# Altium PCB Sensor_Glove-X02.PcbDoc (part 3 of 3)
Units mil, origin at the board's own origin, x right, y up, seen from the top; angles counter-clockwise.
Board outline 1190 x 1020 mil, 2 copper layers (Top Layer, Bottom Layer), stack 5.556 mil thick; 101 components, 52 nets, 320 pads, 71 vias.
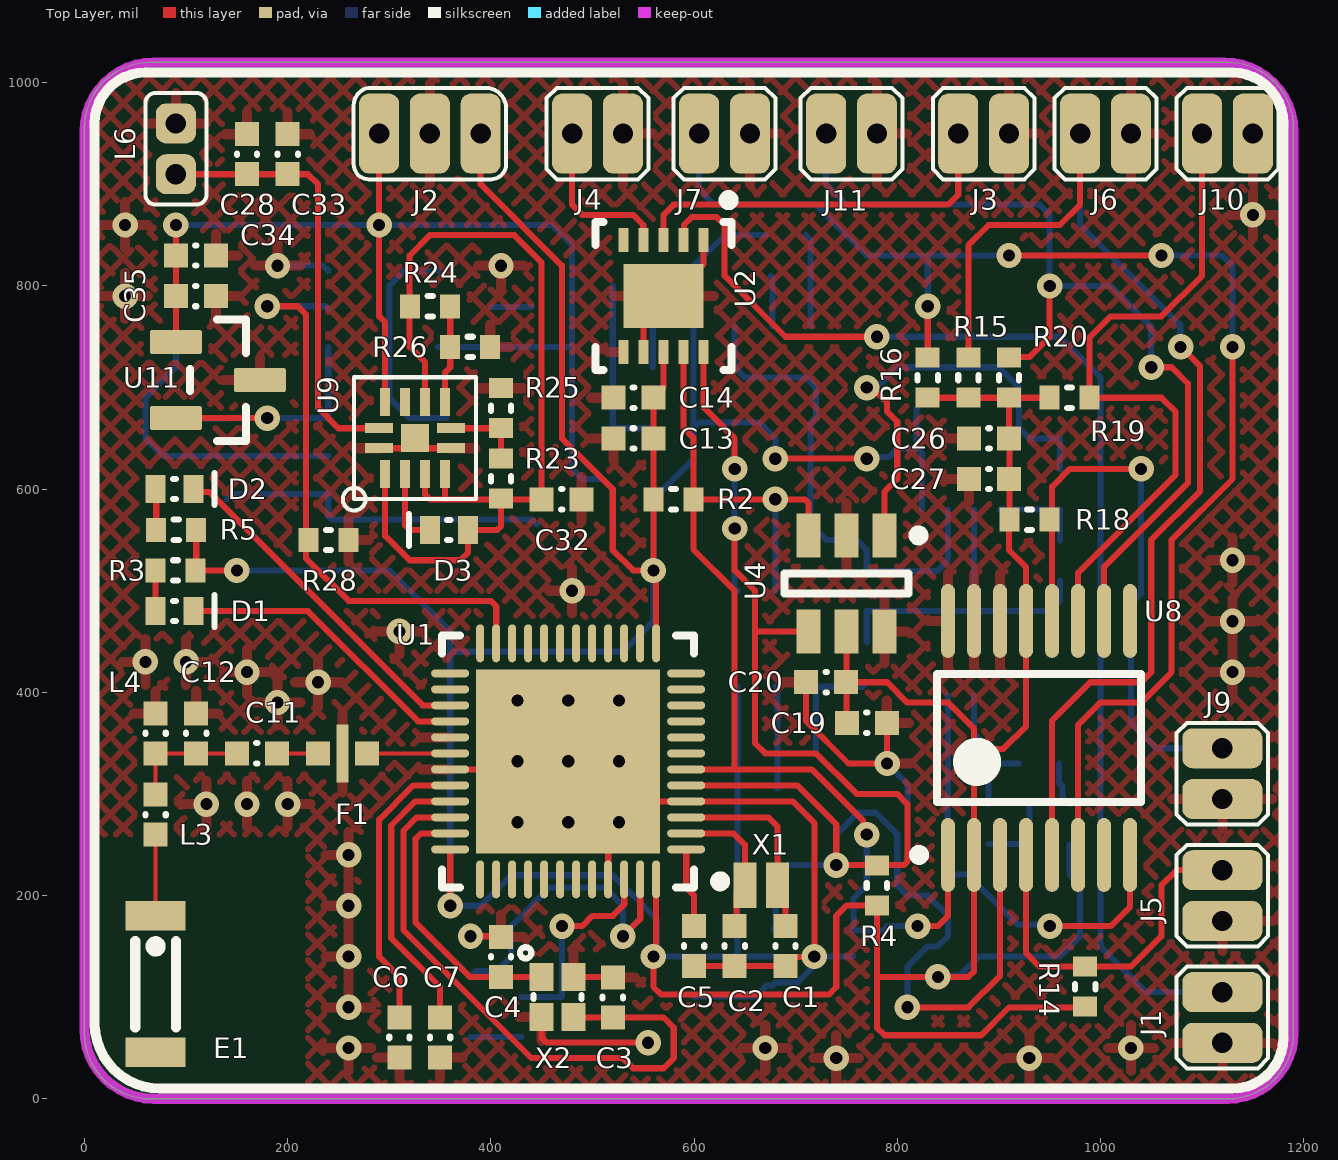
[diagram p0: Top Layer view]

## Part data (continued)
U13: library part CMP-0859-00176-3, "Single Positive-Edge-Triggered D-Type Flip-Flop, DBV0005A, LARGE T&R", Case/Package=SOT-23, Frequency=160MHz, High Level Output Current=-32mA, Low Level Output Current=32mA, Manufacturer="Texas Instruments", Max Operating Temperature=125°C, Max Supply Voltage=5.5V, Min Operating Temperature=-40°C, Min Supply Voltage=1.65V, Package Quantity=3000, Supplier Part Number 1=296-9851-1-ND, Category="Latches and Flip Flops", Clock Edge Trigger Type="Positive Edge", ComponentLink1Description=https://www.ti.com:443/lit/ds/symlink/sn74lvc1g80.pdf?src-supplier=IHS+Markit, ComponentLink1URL=https://www.ti.com:443/lit/ds/symlink/sn74lvc1g80.pdf?src-supplier=IHS+Markit, ComponentLink2Description=https://datasheet.ciiva.com/15091/getdatasheetpartid-71921-15091286.pdf?src-supplier=Verical, ComponentLink2URL=https://datasheet.ciiva.com/15091/getdatasheetpartid-71921-15091286.pdf?src-supplier=Verical, ComponentLink3Description=https://datasheet.ciiva.com/1854/sn74lvc1g80-1854761.pdf?src-supplier=Digi-Key, ComponentLink3URL=https://datasheet.ciiva.com/1854/sn74lvc1g80-1854761.pdf?src-supplier=Digi-Key, ComponentLink4Description=https://datasheet.ciiva.com/46395/1882705-46395835.pdf?src-supplier=Element14, ComponentLink4URL=https://datasheet.ciiva.com/46395/1882705-46395835.pdf?src-supplier=Element14, ComponentLink5Description=https://datasheet.ciiva.com/1854/sn74lvc1g80-1854762.pdf?src-supplier=Digi-Key, ComponentLink5URL=https://datasheet.ciiva.com/1854/sn74lvc1g80-1854762.pdf?src-supplier=Digi-Key, ComponentLink6Description=https://datasheet.ciiva.com/8055/1831218-8055610.pdf?src-supplier=Element14, ComponentLink6URL=https://datasheet.ciiva.com/8055/1831218-8055610.pdf?src-supplier=Element14, ComponentLink7Description=https://datasheet.ciiva.com/1854/sn74lvc1g80-1854763.pdf?src-supplier=Digi-Key, ComponentLink7URL=https://datasheet.ciiva.com/1854/sn74lvc1g80-1854763.pdf?src-supplier=Digi-Key, Lead Free="Lead Free", Logic Function=D-Type,Flip-Flop, Manufacturer Part Number=SN74LVC1G80DBVR, Max Frequency=160MHz, Mount="Surface Mount", Number of Bits=1, Number of Bits per Element=1, Number of Circuits=1, Number of Elements=1, Number of Gates=1, Number of Input Lines=1, Number of Output Lines=1, Number of Pins=5, Output Current=32mA, Packaging="Tape and Reel", Polarity=Inverting, Pricing 1="1=0.32000, 10=0.24000, 25=0.21000, 100=0.13590, 250=0.11252, 500=0.09000, 1000=0.06900 (USD)", Propagation Delay=9.9ns, Radiation Hardening=No, REACH SVHC="No SVHC", RoHS=Yes, Stock 1=12348, Supplier 1=Digi-Key, Turn-On Delay Time=1.1ns, Weight=0.000557oz
X1: library part CRYSTAL_32K768, "Parallel - Fundamental Quartz Crystal, 0.032768MHz Nom", Case/Package=SMD/SMT, ESR (Equivalent Series Resistance)=90kR, Frequency=32.768kHz, Frequency Tolerance=20ppm, Load Capacitance=9pF, Manufacturer="ECS International", Manufacturer Part Number=ECS-.327-9-1210-TR, Max Operating Temperature=85°C, Min Operating Temperature=-40°C, Supplier Part Number 1=XC2283CT-ND, Category="Crystals and Oscillators", ComponentLink1Description=https://datasheet.ciiva.com:443/pdfs/VipMasterIC/IC/ECSI/ECSI-S-A0009254912/ECSI-S-A0009254912-1.pdf?src-supplier=IHS+Markit, ComponentLink1URL=https://datasheet.ciiva.com:443/pdfs/VipMasterIC/IC/ECSI/ECSI-S-A0009254912/ECSI-S-A0009254912-1.pdf?src-supplier=IHS+Markit, ComponentLink2Description=https://www.ecsxtal.com/store/pdf/ECX-1210.pdf?src-supplier=Digi-Key, ComponentLink2URL=https://www.ecsxtal.com/store/pdf/ECX-1210.pdf?src-supplier=Digi-Key, Mount="Surface Mount", Packaging="Tape and Reel", Pricing 1="1=1.52000, 10=1.45400, 50=1.42060, 100=1.21770, 500=1.18388, 1000=0.99784, 2500=0.94710 (USD)", RoHS=No, Stock 1=5205, Supplier 1=Digi-Key
X2: library part CRYSTAL_32MHz, "Parallel - Fundamental Quartz Crystal, 32MHz Nom", Case/Package=SMD/SMT, ESR (Equivalent Series Resistance)=80R, Frequency Stability=10ppm, Load Capacitance=8pF, Manufacturer=Diodes, Manufacturer Part Number=US3200005Z, Max Operating Temperature=70°C, Min Operating Temperature=-20°C, Supplier Part Number 1=US3200005ZCT-ND, Category=Crystals, ComponentLink1Description=https://datasheet.ciiva.com:443/pdfs/VipMasterIC/IC/DIOD/DIOD-S-A0002236499/DIOD-S-A0002236499-1.pdf?src-supplier=IHS+Markit, ComponentLink1URL=https://datasheet.ciiva.com:443/pdfs/VipMasterIC/IC/DIOD/DIOD-S-A0002236499/DIOD-S-A0002236499-1.pdf?src-supplier=IHS+Markit, ComponentLink2Description=https://media.digikey.com/pdf/Data%20Sheets/Pericom%20PDFs/US3200005Z_Ver.A.pdf?src-supplier=Digi-Key, ComponentLink2URL=https://media.digikey.com/pdf/Data%20Sheets/Pericom%20PDFs/US3200005Z_Ver.A.pdf?src-supplier=Digi-Key, Frequency=32MHz, Frequency Tolerance=10ppm, Height=0.014inch, Length=0.063inch, Mount="Surface Mount", Packaging="Tape and Reel", Pricing 1="1=1.45000, 10=1.38400, 50=1.35200, 100=1.15880, 500=1.12666, 1000=0.94961 (USD)", RoHS=Yes, Supplier 1=Digi-Key, Width=0.047inch

## Via types
v1: diameter 25, hole 12, Top Layer to Bottom Layer, 71 vias

## Nets (pads, with @x,y where several pads share a name; then routed paths per layer and width w, separated by ;. In a path a pad name is that pad's centre, name@x,y a point inside that pad or via, vN(x,y) a via of type N, cw(c..) or ccw(c..) an arc to the next point about the centre after c; other vN are vias at no path point)
\H\E\_\E\N\: U11.2 U12.6 U13.1 | length 220
  Top Layer w6: U11.2 v1(180,670)
  Bottom Layer w6: v1(180,670) U12.6 U13.1
\Q\_\O\U\T\: U12.1 U13.4 | length 228.8
  Bottom Layer w6: U13.4 314.8,814.8 300,800 300,690 320,670 U12.1
BLE_ANT: F1.1 U1.30 | length 81.8
  Top Layer w4: F1.1 U1.30
CAP_S1: J1.1 U2.2 | length 1221.7
  Top Layer w6: U2.2 590,845.43 590,860 598,868 622,868 630,860 630,810 690,750 v1(780,750)
  Bottom Layer w6: v1(780,750) 960,750 1000,710 1000,150 1045,105 J1.1
CAP_S2: J3.1 U2.3 | length 383.2
  Top Layer w6: U2.3 570,870 580,880 850,880 860,890 J3.1
CAP_S3: J4.1 U2.4 | length 163.3
  Top Layer w6: J4.1 480,880 490,870 540,870 550,860 550,845.43 U2.4
DEC4: C8.2 L1.1 U1.46 | length 204.8
  Top Layer w6: v1(470,170) 490,170 500,180 520,180 531.26,191.26 U1.46
  Bottom Layer w6: L1.1 C8.2 v1(470,170)
ENABLE_LDO: R27.1 U10.3 U12.4 | length 332.3
  Bottom Layer w6: R27.1 145.2,595.2 U12.4 240,573.51 243.51,570 440.71,570 U10.3
GND: C1.1 C2.1 C3.2 C4.2 C5.2 C6.2 C7.2 C8.1 C9.2 C10.1 C12.2 C13.2 C14.2 C15.2 C16.1 C17.2 C19.2 C20.2 C21.2 C22.2 C23.2 C24.2 C25.2 C26.2 C27.2 C28.2 C29.2 C30.2 C31.1 C32.2 C33.2 C34.2 C35.1 C36.2 C37.1 C38.2 C39.1 F1.3 J1.2 J2.2 J3.2 J4.2 J5.1 J6.1 J7.1 J9.1 J10.1 J11.1 L4.1 L6.2 R13.2 R22.2 R25.2 R26.2 R27.2 R28.1 U1.4 U1.29 U1.31 U1.45 U1.49 U2.1 U2.6 U2.7 U3.2 U3.4 U3.7 U4.2 U4.6 U5.1 U5.4 U6.2 U7.2 U7.6 U8.14 U8.15 U8.16 U9.5 U9.12 U9.13 U10.2 U11.3 U12.2 U12.3 U13.3 X2.2 X2.4 | length 1891.6
  Top Layer w6: U9.12 315.59,640.32 U9.13 335.28,640.32 U9.5 ; U1.31 U1.49@468.27,324.25 ; v1(380,160) 409.37,160 C4.2 ; X2.2 450,60 454.8,55.2 v1(554.8,55.2) ; v1(476.14,332.13) 515.51,292.76 U1.45 ; X2.4 519.37,120 C3.2 ; v1(526.14,272.13) 546.77,292.76 U1.4 697.24,292.76 718.39,271.61 v1(718.39,140) 717.83,139.44 698.81,139.44 C1.1 C2.1 C5.2 ; U2.7 550.31,770.31 570,790 577.87,790 609.37,821.5 U2.1@609.37,845.12 ; C20.2@712.28,408.03 C20.2 710.32,371.69 752,330 v1(790,330) 790,369.69 C19.2
  Bottom Layer w6: C36.2 C37.1 ; v1(190,820) 234.8,820 U13.3 ; C38.2 C39.1 ; C31.1 C30.2 ; C10.1 660.63,100.63 671.5,111.5 677.09,111.5 U3.4 701.7,114.41 718.39,131.09 v1(718.39,140) U3.2 ; R13.2 677.4,808.03 U6.2 ; U7.2 681.97,403.54 C24.2 C25.2 ; v1(790,330) 810,310 C21.2 ; C16.1 959.37,310.63 962.53,307.47 962.53,296.84 R22.2
  other v1: 740,40 930,40 260,50 670,50 1030,50 260,90 260,140 260,190 260,240 426.14,272.13 476.14,272.13 120,290 160,290 200,290 426.14,332.13 526.14,332.13 190,390 426.14,392.13 476.14,392.13 526.14,392.13 230,410 160,420 1130,420 60,430 100,430 310,460 1130,470 480,500 1130,530 40,790 410,820 40,860 1150,870
LBSEL: C32.1 D3.A R23.1 R24.2 U9.1 U9.3 U9.4 U9.8 | length 933.9
  Top Layer w6: U9.1 295.91,554.09 320,530 370,530 377.51,537.51 377.51,559.89 D3.A 406.49,560 410,563.51 R23.1@410,590 ; U9.3 335.28,594.72 340,590 355,590 ; U9.8 335.28,724.72 320,740 320,780 320,830 340,850 423.03,850 450,823.03 C32.1 410.63,590 R23.1 R23.1@410,590 ; U9.4 U9.4 355,590 ; 355,590 R23.1@410,590
LED_BLE: D2.K U1.27 | length 325.5
  Top Layer w6: D2.K 110.13,597.27 122.73,597.27 332.76,387.24 U1.27@344.73,387.24
LED_IND: D1.K U1.28 | length 297.5
  Top Layer w6: D1.K 220,480 328.5,371.5 U1.28
MCU_ENABLE_VCC: R28.2 U1.23 U13.2 | length 585.7
  Top Layer w6: v1(180,780) 210,780 218,772 218,570 218,532 260,490 400,490 405.28,484.72 U1.23
  Bottom Layer w6: v1(180,780) 237.4,780 U13.2
NetC1_2: C1.2 U1.3 X1.1 | length 194.8
  Top Layer w6: U1.3 672.99,277.01 682.28,267.72 X1.1 690,202.28 C1.2
NetC2_2: C2.2 U1.2 X1.2 | length 146.5
  Top Layer w6: U1.2 638.74,261.26 650,250 X1.2 641.68,201.68 641.68,171.68 C2.2
NetC3_1: C3.1 U1.34 X2.3 | length 608.8
  Top Layer w6: U1.34 359.64,276.65 326.65,276.65 314,264 314,166 440,40 530,40 540,30 570,30 580,40 580,70 570,80 C3.1 482.13,80 X2.3
NetC4_1: C4.1 U1.35 X2.1 | length 264.9
  Top Layer w6: U1.35 331.26,261.26 326,256 326,173.32 379.32,120 C4.1 X2.1
NetC5_1: C5.1 U1.1 | length 78.7
  Top Layer w6: U1.1 592.28,207.72 600,200 C5.1
NetC6_1: C6.1 U1.32 | length 287
  Top Layer w6: C6.1 310,120 290,140 290,274.76 323.75,308.5 U1.32
NetC7_1: C7.1 U1.33 | length 276.7
  Top Layer w6: C7.1 350,110 302,158 302,268.97 325.79,292.76 U1.33
NetC11_1: C11.1 F1.2 | length 40.6
  Top Layer w4: C11.1 F1.2
NetC11_2: C11.2 C12.1 L3.1 L4.2 | length 120.6
  Top Layer w4: L3.1 L4.2 C12.1 C11.2
NetC16_2: C16.2 C18.1 R9.2 U5.2 | length 143.5
  Bottom Layer w6: U5.2 875.59,359.29 887.59,347.3 887.59,331.78 C18.1 ; R9.2 890,329.37 C18.1 ; C16.2 C18.1
NetC18_2: C18.2 C21.1 R11.2 U5.3 | length 137.2
  Bottom Layer w6: R11.2@849.37,260 C21.1 850,290.63 C18.2 U5.3
NetC28_1: C28.1 C33.1 L6.1 U9.11 | length 432.4
  Top Layer w6: L6.1 C28.1 220,910 230,900 230,680 250,660 U9.11
NetC29_1: C29.1 C30.1 C31.2 L5.1 U10.5 | length 180
  Bottom Layer w6: C29.1 C30.1 C31.2 U10.5 L5.1
NetD1_A: D1.A R3.2 | length 40
  Top Layer w6: D1.A R3.2
NetD2_A: D2.A R5.2 | length 40.3
  Top Layer w6: D2.A 70.63,599.37 R5.2
NetD3_K: D3.K U9.2 | length 76.6
  Top Layer w6: U9.2 315.59,564.41 320,560 D3.K
NetE1_1: E1.1 L3.2 | length 80
  Top Layer w4: E1.1 L3.2
NetL1_2: L1.2 L2.1 | length 50
  Bottom Layer w6: L2.1 L1.2
NetL2_2: L2.2 U1.47 | length 304.2
  Top Layer w6: v1(530,160) 547.01,177.01 U1.47
  Bottom Layer w6: L2.2 384.86,125.49 405.49,125.49 420,140 420,170 458,208 512,208 530,190 v1(530,160)
NetR6_1: R6.1 R7.2 U5.8 | length 89.4
  Bottom Layer w6: U5.8 R6.1 R7.2
NetR7_1: R7.1 R8.1 R10.2 U5.7 | length 344.8
  Bottom Layer w6: R8.1 R10.2 875.59,480 ; U5.7 875.59,480 ; R7.1 960,490 950,480 875.59,480
NetR10_1: R10.1 U5.6 U6.1 U6.4 | length 485.9
  Bottom Layer w6: U6.1 640,720 650,710 710,710 720,700 720,670.71 U6.4 714.8,565.2 730,550 760,550 770,540 R10.1 839.37,519.37 850,530 U5.6
NetR12_2: R12.2 R13.1 U6.3 | length 92
  Bottom Layer w6: R12.2 714.8,845.2 R13.1 U6.3
NetR23_2: R23.2 R25.1 U9.6 | length 79.1
  Top Layer w6: U9.6 R25.1 R23.2
NetR24_1: R24.1 R26.1 U9.7 | length 96.5
  Top Layer w6: U9.7 354.96,714.96 360,720 R26.1 R24.1
SCL_I2C: R2.2 U1.6 U2.9 U3.1 U4.3 U7.5 U8.1 | length 1137.4
  Top Layer w6: U2.9 589.68,660.32 599.37,650.63 R2.2 ; U1.6 640,324.25 ; U4.3 712.6,586.49 709.08,590 v1(680,590) R2.2 ; v1(770,260) 766.36,263.64 766.36,273.64 715.75,324.25 640,324.25 ; v1(820,170) 840,170 850,180 U8.1 ; R2.2 599.37,540.63 640,500 640,324.25
  Bottom Layer w6: U7.5 v1(680,590) ; v1(770,260) 770,210 756.77,196.77 U3.1 785.59,165.59 790,170 v1(820,170)
SDA_I2C: R4.2 U1.5 U2.10 U3.6 U4.4 U7.4 U8.3 | length 1704.2
  Top Layer w6: U1.5 701.5,308.5 740,270 v1(740,230) 806.49,230 810,233.51 810,290 800,300 760,300 720,340 670,340 660,350 660,460 ; U2.10 609.37,680.63 640,650 v1(640,620) ; v1(640,561.3) 640,520 660,500 660,460 ; U4.4 660,460 ; v1(810,90) 870,90 901.18,121.18 U8.3
  Bottom Layer w6: v1(640,620) v1(640,561.3) 640,502.6 U7.4 ; U3.6@678.39,167.2 U3.6 680,220 690,230 v1(740,230) 740,260 749.8,269.8 749.8,270.2 761.09,281.5 778.91,281.5 800,260.41 800,210 810,200 830,200 850,180 850,160 840,150 830,150 810,130 v1(810,90)
SG_S1: J5.2 R14.2 U8.4 | length 364.1
  Top Layer w6: U8.4 926.77,143.23 940,130 1030,130 1060,160 1060,210 1075,225 J5.2
SG_S2: J6.2 R15.2 U8.5 | length 1155.7
  Top Layer w6: R15.2 870,840 890,860 960,860 980,880 J6.2 ; U8.5 952.36,372.36 990,410 1040,410 1050,420 1050,550 1098,598 1098,720.86 v1(1078.86,740)
  Bottom Layer w6: J6.2 980,860 1078.5,761.5 1078.5,740.36 v1(1078.86,740)
SG_S3: J7.2 R16.2 U8.6 | length 1378.1
  Top Layer w6: R16.2 v1(830,780) ; v1(910,830) v1(1060,830) ; U8.6 977.95,367.95 1000,390 1040,390 1070,420 1070,550 1130,610 v1(1130,740)
  Bottom Layer w6: J7.2 605,895 620,880 720,880 770,830 830,830 ; v1(830,780) 830,830 ; v1(910,830) 830,830 ; v1(1060,830) 1120,830 1130,820 v1(1130,740)
T_S1: J9.2 R18.2 U8.12 | length 581.5
  Top Layer w6: U8.12 952.36,570 952.36,602.36 970,620 v1(1040,620)
  Bottom Layer w6: v1(1040,620) 1040,497.43 1030,487.43 1030,370 1055,345 J9.2
T_S2: J10.2 R19.2 U8.11 | length 671
  Top Layer w6: U8.11 977.95,517.95 1074,614 1074,676 1060,690 R19.2 989.37,749.37 1010,770 1060,770 1100,810 J10.2
T_S3: J11.2 R20.2 U8.10 | length 918
  Top Layer w6: R20.2 910.63,730 930,730 950,750 v1(950,800) ; U8.10 1003.54,523.54 1086,606 1086,704 1070,720 v1(1050,720)
  Bottom Layer w6: J11.2 730,900 750,880 940,880 950,870 v1(950,800) 1010,800 1050,760 v1(1050,720)
V_BATT: C34.1 C35.2 C36.1 C37.2 C38.1 C39.2 J2.1 U9.10 U10.1 U11.1 U12.5 U13.5 | length 1634.5
  Top Layer w6: U11.1 C35.2 v1(90,860) ; J2.1@290,960 v1(290,860) 290,770 295.91,764.09 U9.10
  Bottom Layer w6: U12.5 77.4,632.6 60,650 60,690 90,720 v1(90,860) v1(290,860) 460,860 480,840 480,740 ; U13.5 C38.1 C39.2 480,740 ; U10.1 520,600 510,610 490,610 480,620 480,740
VCC: C9.1 C10.2 C13.1 C14.1 C19.1 C20.1 C22.1 C23.1 C24.1 C25.1 C26.1 C27.1 J2.3 L5.2 R2.1 R3.1 R4.1 R5.1 R12.1 R14.1 R15.1 R16.1 R18.1 R19.1 R20.1 R21.1 U1.13 U1.36 U1.48 U2.8 U3.5 U4.5 U5.5 U6.5 U7.3 U8.2 U8.13 | length 5205.2
  Top Layer w6: R5.1 110,520.63 R3.1 v1(150,520) ; v1(360,190) U1.36 ; J2.3@390,960 390,900 470,820 470,650 520,600 520,540 540,520 v1(560,520) ; U1.48 562.4,215.63 562.4,142.4 v1(560,140) 560,110 567.51,102.49 732.49,102.49 740,110 740,180 750.32,190.31 R4.1 780,120 ; U1.13 562.4,448.63 562.4,517.6 v1(560,520) ; U2.8@568.08,732.96 U2.8 570,700 C14.1 C13.1 R2.1 v1(560,520) ; v1(680,630) v1(770,630) ; C19.1@750,380 750,409.69 C20.1 C20.1@750,410 ; U4.5 C20.1@750,410 ; R16.1 R15.1 R20.1 ; R19.1 R20.1 ; R14.1 984.37,90 910,90 882.49,62.49 787.51,62.49 780,70 780,120 ; C20.1@750,410 790,410 810,390 850,390 875.59,364.41 875.59,344.41 ; 780,120 v1(840,120) 870,120 875.59,125.59 U8.2 875.59,344.41 ; 875.59,344.41 904.41,344.41 926.77,366.77 U8.13 926.77,523.23 910,540 910,569.37 R18.1 910.63,649.37 C26.1 R20.1
  Bottom Layer w6: v1(150,520) 300,520 360,460 360,440 ; U7.3 C24.1 C25.1 C9.1@642.6,140 ; R12.1 630,850 599.37,819.37 L5.2 ; U3.5 C9.1@642.6,140 ; v1(680,630) 680,650 664.49,665.51 U6.5 604.88,665.51 L5.2 ; v1(770,630) 771.5,631.5 791.5,631.5 800,640 C23.1 ; C22.1 818.82,678.82 818.82,641.18 C23.1 ; U5.5 824.41,635.59 C23.1 ; v1(840,120) 841.5,121.5 861.5,121.5 880,140 960,140 980,160 980,210 969.37,220.63 R21.1 ; 360,440 530,440 560,470 v1(560,520) 560,590 599.37,629.37 L5.2 ; 360,440 v1(360,190) 390,190 420,220 520,220 563.51,176.49 563.51,143.51 v1(560,140) C10.2 C9.1 C9.1@642.6,140
WB_REF_DAC: C17.1 R8.2 U7.1 | length 121
  Bottom Layer w6: C17.1 720,402.91 U7.1 765.51,405.51 R8.2
WB_V1: R11.1 U8.8 | length 258.9
  Top Layer w6: v1(950,170) 1010,170 1029.13,189.13 U8.8
  Bottom Layer w6: R11.1 869.37,220.63 918.5,171.5 948.5,171.5 v1(950,170)
WB_V2: R9.1 R21.2 R22.1 | length 80.3
  Bottom Layer w6: R9.1 929.37,250.63 R21.2 R22.1
WB_V_OUT: C15.1 R6.2 U4.1 | length 448.8
  Top Layer w6: v1(770,700) 775.14,700 786.21,688.93 786.55,688.93 790.06,685.41 790.06,676.42 800,666.49 800,610 787.4,597.4 U4.1@787.4,557.09 ; U4.1 U4.1@790,557.09
  Bottom Layer w6: v1(770,700) 773.64,703.64 783.64,703.64 800,720 900,720 920,700 920,660 930,650 C15.1 R6.2
pads on no net: E1.2 U1.7 U1.8 U1.9 U1.10 U1.11 U1.12 U1.14 U1.15 U1.16 U1.17 U1.18 U1.19 U1.20 U1.21 U1.22 U1.24 U1.25 U1.26 U1.37 U1.38 U1.39 U1.40 U1.41 U1.42 U1.43 U1.44 U2.5 U3.3 U8.7 U8.9 U9.9 U10.4

## Polygon pours and split planes (outlines as drawn)
GND on Top Layer "GND_L01_P000" (hatched 45Degree grid 18 track 6, remove dead copper, pour order 0): 220,0 220,260 0,260 0,1020 1190,1020 1190,0
GND on Bottom Layer "GND_L02_P001" (hatched 45Degree grid 20 track 8, remove dead copper, pour order 1): 220,0 220,260 3.8,260 3.8,1020 1193.8,1020 1193.8,0

## Keep-outs
Keep-Out Layer:
  lines w10: 0,68.28 ccw(c68.28,68.28) 68.28,0 1125.51,0 ccw(c1125.51,64.49) 1190,64.49 1190,951.72 ccw(c1121.72,951.72) 1121.72,1020 68.28,1020 ccw(c68.28,951.72) 0,951.72 0,68.28

## Silkscreen, mask and mechanical layers (free items; w line width, h text height)
Top Overlay:
  lines w10: 10,74.49 ccw(c74.49,74.49) 74.49,10 1130,10 ccw(c1130,60) 1180,60 1180,113.73 1180,960 ccw(c1130,960) 1130,1010 60,1010 ccw(c60,960) 10,960 10,74.49
Bottom Overlay:
  lines w10: 10,78.28 ccw(c78.28,78.28) 78.28,10 1115.51,10 ccw(c1115.51,74.49) 1180,74.49 1180,100 1180,940 1180,960 ccw(c1130,960) 1130,1010 1110,1010 60,1010 ccw(c60,960) 10,960 10,78.28
Board_Outline:
  the board outline again, w10